# Allegro board ASR6601QFN68_Module_V10_210527.brd
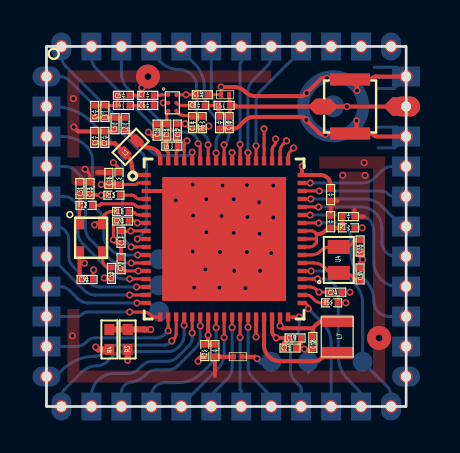
[diagram p0: board, top side]
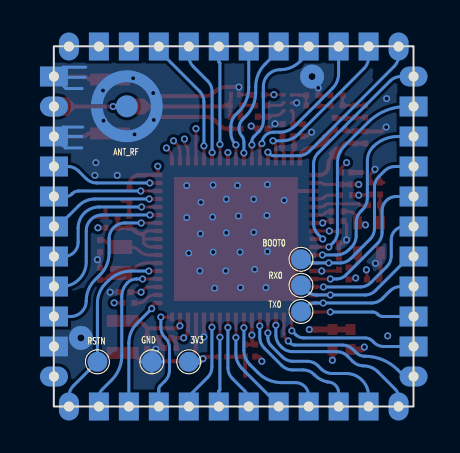
[diagram p1: board, bottom side, seen from below]

Outline 18.01 x 18.01 mm; copper layers: TOP, GND, VCC, BOTTOM. Coordinates in mm from the lower left corner of the outline.
Outline path: rectangle 0,0 18.01,18.01

## Placement (name value [footprint] x y rotation side)
C1  47nF  [C0201]  2.42 13.46 270 top
C2  82pF  [C0201]  2.92 13.46 270 top
C3  5.0pF  [C0201]  3.43 14.14 90 top
C4  3.3pF  [C0201]  2.42 14.75 90 top
C5  12pF  [C0201]  3.85 15.56 0 top
C6  100pF  [C0201]  5.07 15.05 0 top
C7  8.2pF  [C0201]  5.07 15.56 0 top
C8  100pF  [C0201]  7.62 15.06 0 top
C9  NC  [C0201]  8.66 14.19 90 top
C10  NC  [C0201]  9.14 14.19 90 top
C11  4.7pF  [C0201]  6.02 13.82 90 top
C12  3.9pF  [C0201]  6.55 13.82 90 top
C13  1pF  [C0201]  5.54 13.82 90 top
C14  100pF  [C0201]  7.32 14.19 270 top
C15  100pF  [C0201]  7.8 15.59 180 top
C16  0.1uF  [C0201]  3.12 11.4 90 top
C17  0.1uF  [C0201]  3.73 8.46 270 top
C18  0.47uF  [C0201]  13.34 3.2 270 top
C19  0.1uF  [C0201]  12.45 3.43 180 top
C20  0.1uF  [C0201]  3.81 9.27 0 top
C21  2.2uF  [C0201]  12.19 2.92 180 top
C22  0.1uF  [C0201]  3.73 7.14 270 top
C23  0.1uF  [C0201]  8.43 2.79 90 top
C24  0.1uF  [C0201]  14.48 5.71 0 top
C27  2.2uF  [C0201]  14.23 9.24 90 top
C28  0.01uF  [C0201]  15.12 9.49 180 top
C30  0R(0.1uF)  [C0201]  2.03 6.35 180 top
C31  NC(10pF)  [C0201]  1.68 10.9 90 top
C32  0R  [C0201]  3.25 6.65 270 top
C33  NC(10pF)  [C0201]  2.18 10.9 90 top
C34  NC(10pF)  [C0201]  15.7 6.63 90 top
C35  NC(10pF)  [C0201]  15.7 8.03 90 top
C36  0.1uF  [C0201]  14.22 10.59 270 top
D1  PESD3V3Z1BSF  [DSN0603_2N_MM]  9.58 2.49 180 top
D2  PESD5V0H1BSF  [DSN0603_2N_MM]  8.94 15.59 0 top
J1  -  [IPEX]  15.2 15 180 top
J2  HDR  [ASR6601QFN48_1600X1600_46N3_MM]  9 9 0 top
L1  56nH  [L0402]  4.22 12.98 225 top
L2  2.2nH  [L0201]  3.94 14.14 90 top
L3  8.2nH  [L0201]  2.92 14.75 90 top
L4  18nH  [L0201]  3.85 15.05 0 top
L5  0R  [L0201]  8.89 15.06 0 top
L6  33nH  [L0201]  6.28 13.02 180 top
L7  15uH  [L2016]  14.55 3.48 90 top
R1  0R  [R0201]  15.12 8.93 180 top
R2  0R  [R0201]  7.92 2.79 90 top
R3  0R  [R0402]  4.06 3.35 90 top
R4  0R  [R0402]  3.15 3.35 90 top
R5  100R  [R0201]  14.27 5.18 0 top
R6  100R  [R0201]  7.8 14.19 270 top
R7  NC(0R)  [R0201]  3.63 11.4 90 top
R11  NC(0R)  [R0201]  3.81 9.75 0 top
R12  0R  [R0201]  1.98 10.06 0 top
R13  0R  [R0201]  3.38 10.57 0 top
TP1  TP  [TP_SMD180CR120_110C_MM]  14.35 15.01 0 bottom
TP2  TP_1MM  [TP_SMD100C100_MM]  11.25 2.24 180 bottom
TP3  TP_1MM  [TP_SMD100C100_MM]  13.1 2.24 180 bottom
TP4  TP_1MM  [TP_SMD100C100_MM]  5.64 7.36 180 bottom
TP5  TP_1MM  [TP_SMD100C100_MM]  15.82 2.24 180 bottom
TP6  TP_1MM  [TP_SMD100C100_MM]  5.64 6.06 180 bottom
TP7  TP_1MM  [TP_SMD100C100_MM]  5.64 4.75 180 bottom
U1  ASR6601QFN68  [ASR6505_QFN40P_800X800_68N_MM]  8.89 8.38 0 top
U2  XMSSJR6G0BA-093  [QFN40P_110X70_6N_MM]  6.3 15.18 0 top
U3  TCXO/XO_32M  [OSC_SMD200X160_4N_MM]  2.24 8.43 270 top
U4  XO_32.768K  [XTAL_SMD160X100_2N_MM]  14.63 7.33 90 top

## Library data of the parts
C1-C24 C27 C28 C30-C36 = RCL_CAP_NP
D1 D2 = TVS-BI
J1 = UFLR_0
J2 = CN_9
L1-L7 = RCL_IND
R1-R7 R11-R13 = RCL_RES
TP1 = UFLR_1
TP2-TP7 = TP_SMT
U1 = ASR6505_11
U2 = MXD8625C_0
U3 = TCXO_32M
U4 = XO

## Footprints (pads in the part's own frame, mm; a bottom-side part is the same pattern mirrored in y, then rotated)
ASR6505_QFN40P_800X800_68N_MM
  rect 0.45x0.22 smd: 1(-3.9,3.2) 2(-3.9,2.8) 3(-3.9,2.4) 4(-3.9,2) 5(-3.9,1.6) 6(-3.9,1.2) 7(-3.9,0.8) 8(-3.9,0.4) 9(-3.9,0) 10(-3.9,-0.4) 11(-3.9,-0.8) 12(-3.9,-1.2) 13(-3.9,-1.6) 14(-3.9,-2) 15(-3.9,-2.4) 16(-3.9,-2.8) 17(-3.9,-3.2) 35(3.9,-3.2) 36(3.9,-2.8) 37(3.9,-2.4) 38(3.9,-2) 39(3.9,-1.6) 40(3.9,-1.2) 41(3.9,-0.8) 42(3.9,-0.4) 43(3.9,0) 44(3.9,0.4) 45(3.9,0.8) 46(3.9,1.2) 47(3.9,1.6) 48(3.9,2) 49(3.9,2.4) 50(3.9,2.8) 51(3.9,3.2)
  rect 0.22x0.45 smd: 18(-3.2,-3.9) 19(-2.8,-3.9) 20(-2.4,-3.9) 21(-2,-3.9) 22(-1.6,-3.9) 23(-1.2,-3.9) 24(-0.8,-3.9) 25(-0.4,-3.9) 26(0,-3.9) 27(0.4,-3.9) 28(0.8,-3.9) 29(1.2,-3.9) 30(1.6,-3.9) 31(2,-3.9) 32(2.4,-3.9) 33(2.8,-3.9) 34(3.2,-3.9) 52(3.2,3.9) 53(2.8,3.9) 54(2.4,3.9) 55(2,3.9) 56(1.6,3.9) 57(1.2,3.9) 58(0.8,3.9) 59(0.4,3.9) 60(0,3.9) 61(-0.4,3.9) 62(-0.8,3.9) 63(-1.2,3.9) 64(-1.6,3.9) 65(-2,3.9) 66(-2.4,3.9) 67(-2.8,3.9) 68(-3.2,3.9)
  rect 6.2x6.2 smd: 69(0,0)
ASR6601QFN48_1600X1600_46N3_MM
  round 0.65 hole 0.5: 1(-8.25,9) 2(-6.75,9) 3(-5.25,9) 4(-3.75,9) 5(-2.25,9) 6(-0.75,9) 7(0.75,9) 8(2.25,9) 9(3.75,9) 10(5.25,9) 11(6.75,9) 12(8.25,9) 13(9,7.5) 15(9,4.5) 16(9,3) 17(9,1.5) 18(9,0) 19(9,-1.5) 20(9,-3) 21(9,-4.5) 22(9,-6) 23(9,-7.5) 24(8.25,-9) 25(6.75,-9) 26(5.25,-9) 27(3.75,-9) 28(2.25,-9) 29(0.75,-9) 30(-0.75,-9) 31(-2.25,-9) 32(-3.75,-9) 33(-5.25,-9) 34(-6.75,-9) 35(-8.25,-9) 36(-9,-7.5) 37(-9,-6) 38(-9,-4.5) 39(-9,-3) 40(-9,-1.5) 41(-9,0) 42(-9,1.5) 43(-9,3) 44(-9,4.5) 45(-9,6) 46(-9,7.5)
  oval 1.4x1 hole 0.5: 14(9,6)
C0201
  rect 0.3x0.3 smd: 1(-0.3,0) 2(0.3,0)
DSN0603_2N_MM
  rect 0.2x0.28 smd: 1(-0.2,0) 2(0.2,0)
IPEX
  rect 2x0.6 smd: 1(0,1.35) 2(0,-1.35)
  rect 0.7x0.8 smd: 3(1.35,0)
L0201
  rect 0.3x0.3 smd: 1(-0.3,0) 2(0.3,0)
L0402
  rect 0.47x0.58 smd: 1(-0.425,0) 2(0.425,0)
L2016
  rect 0.6x1.6 smd: 1(-0.8,0) 2(0.8,0)
OSC_SMD200X160_4N_MM
  rect 0.65x0.45 smd: 1(-0.75,-0.575) 2(0.75,-0.575) 3(0.75,0.575) 4(-0.75,0.575)
QFN40P_110X70_6N_MM
  round 0.2 smd: 1(-0.2,0.4) 2(-0.2,0) 3(-0.2,-0.4) 4(0.2,-0.4) 5(0.2,0) 6(0.2,0.4)
R0201
  rect 0.3x0.3 smd: 1(-0.3,0) 2(0.3,0)
R0402
  rect 0.55x0.5 smd: 1(-0.5,0) 2(0.5,0)
TP_SMD100C100_MM
  round 1 smd: 1(0,0)
TP_SMD180CR120_110C_MM
  round 1.1 smd: 1(0,0)
  custom 3.597x3.6 smd: 2(0,0)
XTAL_SMD160X100_2N_MM
  rect 0.7x1.1 smd: 1(-0.65,0) 2(0.65,0)

## Nets
GND: C1.1 C2.1 C3.1 C5.2 C7.1 C9.1 C10.1 C12.2 C13.1 C14.2 C15.1 C16.2 C17.2 C18.2 C19.1 C20.1 C21.1 C22.1 C23.1 C24.2 C27.2 C28.1 C30.2 C31.2 C33.2 C34.2 C35.1 C36.2 D1.2 D2.1 J1.1 J1.2 J2.13 J2.15 J2.22 TP1.2 TP3.1(TP) U1.3(GND_PLL) U1.30(GND_DCC) U1.69(GND) U2.2(GND) U3.2(GND#2)
VCC_3V3: D1.1 J2.23 R1.1 R2.1 R3.1 TP2.1(TP)
VDD_IN: C16.1 R4.1 R7.1 U1.2(VDD_IN)
VDD_RF: C19.2 C20.2 C21.2 R3.2 R4.2 U1.7(VBAT_RF) U1.32(VBAT_DCC)
VDDA: C27.1 C28.2 R1.2 U1.42(VBAT_RTC) U1.43(VBAT_ANA) U1.44(VREFP)
VDDD: C22.2 C23.2 C24.1 C36.1 R2.2 U1.13(VBAT_ESD0) U1.24(VBAT_ESD1) U1.37(VBAT_ESD_RTC) U1.51(VBAT_ESD2) U1.59(VABT_ESD3)
ANT_SW_CTRL: R5.1 U1.36(GPIO59/LORAC_RF_SW)
GPIO00: J2.45 U1.10(GPIO00/SPI_CLK)
GPIO01: J2.46 U1.9(GPIO01/SPI_SEL)
GPIO02: J2.43 TP4.1(TP) U1.12(GPIO02/SPI_MISO)
GPIO03: J2.44 U1.11(GPIO03/SPI_MOSI)
GPIO04: J2.16 U1.50(GPIO04/ADC_IN3)
GPIO05: J2.17 U1.49(GPIO05/ADC_IN2)
GPIO06: J2.42 U1.14(GPIO06/SWD_DAT)
GPIO07: J2.41 U1.15(GPIO07/SWD_CLK)
GPIO08: J2.18 U1.48(GPIO08/ADC_IN1)
GPIO09: J2.12 U1.52(GPIO09/DAC_OUT)
GPIO10: R6.2 U1.55(GPIO10/OPA0_OUT)
GPIO11: J2.19 U1.47(GPIO11/ADC_IN0)
GPIO12: J2.20 U1.46(GPIO12/XO24M_OUT)
GPIO13: J2.21 U1.45(GPIO13/XO24M_IN)
GPIO14: J2.38 U1.18(GPIO14/I2C_CLK)
GPIO15: J2.37 U1.19(GPIO15/I2C_DAT)
GPIO16: J2.40 TP6.1(TP) U1.16(GPIO16/UART0_RX)
GPIO17: J2.39 TP7.1(TP) U1.17(GPIO17/UART0_TX)
GPIO23: J2.36 U1.20(GPIO23)
GPIO24: J2.34 U1.22(GPIO24)
GPIO25: J2.35 U1.21(GPIO25)
GPIO26: J2.32 U1.25(GPIO26)
GPIO27: J2.33 U1.23(GPIO27)
GPIO28: J2.30 U1.27(GPIO28)
GPIO29: J2.31 U1.26(GPIO29)
GPIO30: J2.29 U1.28(GPIO30)
GPIO31: J2.28 U1.29(GPIO31)
GPIO32: J2.4 U1.62(GPIO32/COMP1_OUT)
GPIO33: J2.5 U1.61(GPIO33/COMP1_INN)
GPIO34: J2.2 U1.65(GPIO34/OPA2_OUT)
GPIO35: J2.1 U1.64(GPIO35/OPA2_INN)
GPIO36: J2.3 U1.63(GPIO36/OPA2_INP)
GPIO37: J2.6 U1.60(GPIO37/COMP1_INP)
GPIO40: J2.7 U1.58(GPIO40/OPA1_OUT)
GPIO41: J2.8 U1.57(GPIO41/OPA1_INN)
GPIO42: J2.9 U1.56(GPIO42/OPA1_INP)
GPIO44: J2.10 U1.54(GPIO44/OPA0_INN)
GPIO45: J2.11 U1.53(GPIO45/OPA0_INP)
GPIO58: J2.25 U1.38(GPIO58/LP_TIMER)
GPIO60: J2.26 U1.35(GPIO60/LPUART_RX)
GPIO62: J2.27 U1.34(GPIO62/WKUP)
PWR_TCXO: R11.2 U1.6(PWR_TCXO)
RF_ANT: C10.2 D2.2 J1.3 J2.14 L5.2 TP1.1
RFI_N: C11.1 L6.2 U1.67(RFI_N)
RFI_P: C12.1 L6.1 U1.66(RFI_P)
RFO: L1.1 L2.1 U1.68(RFO)
RSTN: J2.24 TP5.1(TP) U1.39(RSTN)
VR_PA: C1.2 C2.2 L1.2 U1.1(VR_PA)
VREG: C17.1 C18.1 L7.2 R7.2 U1.8(VDCC_RF) U1.33(VREG)
XO32K_IN: C34.1 U1.40(XO32K_IN) U4.1(XTA)
XO32K_OUT: C35.2 U1.41(XO32K_OUT) U4.2(XTB)
XTA: R13.2 U1.4(XTA)
XTB: R12.2 U1.5(XTB)
N16688294: C30.1 R11.1 U3.4(VCC)
N16688298: C31.1 R12.1 U3.1(GND#1)
N16688382: C32.2 C33.1 R13.1
N16688514: C32.1 U3.3(VOUT)
N16827128: L7.1 U1.31(DCC_SW)
N16895695: C8.2 C9.2 L5.1
N16895705: C11.2 C13.2 U2.3(RF1)
N16895733: C6.2 C7.2 U2.1(RF2)
N16895757: C15.2 R5.2 U2.6(V1)
N16895762: C3.2 C4.1 L2.2 L3.1
N16895764: C4.2 C5.1 L3.2 L4.1
N16895803: C14.1 R6.1 U2.4(VDD)
N16895926: C8.1 U2.5(ANT)
N16895955: C6.1 L4.2

## Via types
v1: diameter 0.356, hole 0.203, TOP to BOTTOM, 116 vias
v2: diameter 1.2, hole 0.35, TOP to BOTTOM, 2 vias

## Routing (per net, layer and track width the routed paths; a pad name or vN(x,y) marks a point on that pad's centre or on a via; arc(x,y) is an arc through that point)
GND: length 71.5
  TOP w0.15: C12.2 6.92,14.12 v1(6.93,14.14) 7.18,13.89 C14.2 ; v1(1.93,11.86) 2.07,11.72 arc(2.15,11.6) 2.18,11.44 C33.2 C31.2 ; v1(4.77,15.93) C7.1 C5.2 ; C17.2 3.57,8.16 arc(3.49,8.17) 3.42,8.22 3.35,8.28 v1(3.35,8.33) 3.35,9.11 C20.1 ; C35.1 15.7,7.47 v1(15.82,7.34) 15.7,7.21 C34.2 ; C31.2 1.68,11.4 ; C31.2 1.48,11.2 ; v1(8.74,15.97) D2.1 C15.1 ; C13.1 5.3,13.52 v1(5.11,13.72) ; U2.2 v1(5.85,15.18) ; C24.2 v1(15.19,5.71)
  TOP w0.2: U1.3 5.71,10.78 arc(5.99,10.72) 6.23,10.56 v1(6.48,10.31) ; C3.1 3.35,13.76 C2.1 ; C19.1 12.75,3.17 C21.1 12.85,2.92 v1(12.9,2.87) 12.9,2.87 arc(13.1,2.79) 13.3,2.87 C18.2 ; J1.1 14.01,13.65 v1(13.96,13.61) 13.82,13.61 arc(13.73,13.63) 13.65,13.68 v1(13,14.33) 12.91,14.42 arc(12.85,14.46) 12.77,14.48 10.35,14.48 arc(10.13,14.43) 9.94,14.31 9.64,14.01 arc(9.51,13.92) 9.35,13.89 C10.1 C9.1 ; J1.1 16.21,13.65 arc(16.29,13.63) 16.36,13.59 16.39,13.56 arc(16.46,13.52) 16.54,13.5 J2.15 ; J1.1 15.52,13.97 v1(15.52,14.29) ; v1(8.74,15.97) 9.41,15.97 arc(9.69,15.92) 9.92,15.76 9.94,15.73 arc(10.18,15.58) 10.46,15.52 12.79,15.52 arc(12.87,15.54) 12.94,15.58 v1(13.03,15.67) ; J1.2 15.54,16.01 v1(15.54,15.8) ; J1.2 16.17,16.35 arc(16.25,16.37) 16.31,16.41 16.34,16.44 arc(16.41,16.48) 16.49,16.5 J2.13 ; J1.2 15.14,16.41 v1(14.04,16.41) 13.87,16.41 13.87,16.41 13.77,16.41 v1(13.03,15.67) ; v1(13.03,15.67) 13.03,15.67 ; U3.2 1.66,7.16 ; 1.66,7.16 1.66,6.42 C30.2 ; 1.66,7.16 v1(1.91,7.16) ; U1.30 v1(10.49,3.48) ; C27.2 14.23,10.04 14.22,10.04 C36.2 14.57,10.29 ; 15.42,9.85 C28.1 15.89,9.49 ; v1(1.37,13.97) 1.59,13.76 C1.1 ; 8.43,1.52 C23.1 8.68,2.49 8.69,2.49 D1.2 ; C17.2 C22.1
  TOP w0.25: C1.1 C2.1 ; C16.2 2.57,11.7
  GND w0.15: 16.72,7.03 16.73,7.03
  GND w0.2: 17.82,16.5 17.27,17.04 ; 17.82,16.5 J2.13 ; 17.82,16.5 16.82,16.5 ; 17.8,16.5 17.07,15.77 ; J2.22 17.34,2.34 ; J2.22 17.44,3.56 ; J2.22 17.15,3 ; 17.2,14.1 17.8,13.5 ; 17.8,13.5 17.14,12.85 ; 17.8,13.5 16.95,13.5 ; 17.8,13.5 J2.15
  VCC w0.15: 17.05,16.5 J2.13 ; J2.13 17.46,17.04 17.14,17.04 ; J2.13 17.35,15.85 17.17,15.85 ; 17.99,13.51 17.35,14.15 17.09,14.15 ; 17.02,12.9 17.4,12.9 J2.15
  VCC w0.2: J2.22 17.49,3.51 ; J2.22 17.4,2.4 ; J2.22 17.19,3 ; 17.04,13.51 17.99,13.51 J2.15
  BOTTOM w0.15: 16.61,12.93 17.43,12.93 J2.15 ; J2.15 17.53,13.97 16.56,13.97 ; J2.15 16.6,13.5 ; TP3.1 13.65,2.24 ; TP3.1 13.1,2.79 ; TP3.1 13.1,1.68 ; TP3.1 12.55,2.24 ; 16.43,16.46 17.96,16.46 ; 17.96,16.46 17.4,15.9 16.59,15.9 ; 17.96,16.46 J2.13 17.53,16.97 16.41,16.97
  vias: v1(1.35,15.39) v1(1.3,3.53) v1(7.32,11.1) v1(7.34,9.55) v1(7.32,7.75) v1(7.39,5.94) v1(8,10.36) v1(8,8.71) v1(7.95,6.86) v1(8.69,7.72) v1(8.66,5.94) v1(8.81,11.05) v1(8.76,9.53) v1(9.37,10.36) v1(9.37,8.69) v1(9.4,6.78) v1(10.03,11.07) v1(10.03,7.72) v1(9.96,5.92) v1(10.06,9.47) v1(10.64,10.21) v1(10.67,8.64) v1(10.69,6.78) v1(11.25,7.67) v1(11.35,11.05) v1(11.35,9.45) v1(14.83,11.56) v1(15.9,12.19) v1(15.95,11.56) v2(5.08,16.5) v2(16.65,3.43)
VCC_3V3: length 26.6
  TOP w0.2: D1.1 10.44,2.49 v1(10.54,2.39) ; v1(15.8,8.93) R1.1 ; R2.1 7.79,2.49 arc(7.65,2.44) 7.59,2.29 v1(7.59,2.26)
  TOP w0.3: R3.1 v1(4.06,2.31)
  VCC w0.2: v1(15.8,8.93) 16.14,8.59 arc(16.36,8.27) 16.43,7.88 16.43,6.96 arc(16.34,6.47) 16.06,6.05 arc(15.94,5.87) 15.89,5.66 15.89,1.52
  VCC w0.3: 7.59,1.52 v1(7.59,2.26) ; 7.59,1.52 5.38,1.52 arc(4.89,1.62) 4.48,1.9 v1(4.06,2.31) ; 7.59,1.52 10.59,1.52 ; J2.23 17.98,1.52 10.59,1.52 ; v1(10.54,2.39) 10.54,2.06 10.53,2.05 10.53,1.58 10.59,1.52
  BOTTOM w0.3: v1(10.54,2.39) 10.59,2.39 10.74,2.24 TP2.1
VDD_IN: length 12.3
  TOP w0.15: U1.2 4.57,11.18 4.5,11.1 R7.1
  TOP w0.2: R7.1 C16.1 2.75,11.1 v1(2.74,11.1)
  TOP w0.3: R4.1 2.58,2.85 v1(2.46,2.97)
  VCC w0.25: v1(2.74,11.1) 2.43,11.1 arc(1.74,10.81) 1.45,10.12 1.45,5.42 arc(1.71,4.1) v1(2.46,2.97)
VDD_RF: length 18
  TOP w0.15: C20.2 4.45,9.27 v1(4.55,9.18) U1.7
  TOP w0.2: U1.32 11.29,3.77 arc(11.32,3.65) 11.39,3.55 v1(11.51,3.43) C19.2 11.89,3.17 C21.2
  TOP w0.3: v1(5.22,3.85) 4.89,3.85 4.89,3.85 R3.2 R4.2
  VCC w0.25: v1(4.55,9.18) 5.15,9.18 arc(5.58,9) 5.76,8.56 5.76,5.71 arc(5.82,5.41) 5.99,5.15 6.26,4.89 ; 6.26,4.89 v1(5.22,3.85) ; 6.26,4.89 6.44,4.7 arc(6.61,4.59) 6.81,4.55 9.87,4.55 arc(10.35,4.45) 10.75,4.18 v1(11.51,3.43)
VDDA: length 4.7
  TOP w0.15: 13.51,8.38 13.51,8.18 13.41,8.08 arc(13.3,8) 13.17,7.98 U1.42 ; 13.51,8.38 13.51,8.64 13.43,8.72 arc(13.37,8.76) 13.29,8.78 U1.44 ; 13.51,8.38 13.51,8.38 U1.43
  TOP w0.2: 13.51,8.64 13.54,8.61 arc(13.77,8.66) 13.97,8.79 14.12,8.94 C27.1 14.59,8.94 14.59,8.93 R1.2 C28.2
VDDD: length 35.3
  TOP w0.15: v1(9.29,12.7) U1.59 ; C24.1 v1(13.64,5.71) 13.5,5.86 arc(13.37,5.94) 13.21,5.98 U1.37 ; C22.2 3.8,6.78 v1(4.6,6.78) U1.13
  TOP w0.2: C36.1 14.22,11.07 arc(14.08,11.43) 13.72,11.58 U1.51 12.79,12.01 v1(12.8,12.01) ; U1.24 v1(8.09,3.57) 8.09,3.36 arc(8.07,3.27) 8.02,3.19 R2.2 C23.2
  VCC w0.2: v1(13.64,5.71) 12.19,5.71 ; 12.19,5.71 12.19,3.79 arc(11.9,3.09) 11.19,2.79 8.09,2.79 ; 12.19,5.71 12.19,11.66 12.24,11.71 ; v1(9.29,12.7) 9.29,12.27 arc(9.46,11.87) 9.86,11.71 12.24,11.71 ; v1(12.8,12.01) 12.57,11.79 arc(12.49,11.73) 12.39,11.71 12.24,11.71 ; 8.09,2.79 5.14,2.79 arc(4.62,2.9) 4.17,3.19 3.96,3.41 arc(3.66,3.85) 3.56,4.38 3.56,6.29 arc(3.7,6.63) 4.04,6.78 v1(4.6,6.78) ; 8.09,2.79 v1(8.09,3.57)
ANT_SW_CTRL: length 1.3
  TOP w0.15: R5.1 13.75,5.18 arc(13.58,5.22) 13.43,5.32 13.29,5.45 arc(13.16,5.54) 13,5.58 U1.36
GPIO00: length 10.2
  TOP w0.15: v1(4.24,7.97) 4.49,7.97 4.49,7.98 U1.10
  BOTTOM w0.15: J2.45 0.36,15 arc(1.4,14.79) 2.28,14.21 3.46,13.03 arc(3.72,12.64) 3.81,12.17 3.81,8.7 arc(3.86,8.43) 4.01,8.2 v1(4.24,7.97)
GPIO01: length 11.3
  TOP w0.15: U1.9 v1(4.55,8.38)
  BOTTOM w0.15: v1(4.55,8.38) 4.79,8.61 arc(4.95,8.85) 5,9.14 5,12.14 arc(4.95,12.42) 4.78,12.67 1.17,16.28 arc(0.93,16.44) 0.64,16.5 J2.46
GPIO02: length 9.9
  TOP w0.15: U1.12 v1(4.24,7.18)
  BOTTOM w0.15: J2.43 0.92,12 arc(1.21,11.94) 1.45,11.78 1.74,11.5 arc(1.9,11.25) 1.96,10.97 1.96,8.9 arc(2.01,8.61) 2.18,8.37 3.15,7.4 arc(3.39,7.23) 3.68,7.18 v1(4.24,7.18) 5.33,7.18 arc(5.44,7.2) 5.53,7.26 TP4.1
GPIO03: length 9.5
  TOP w0.15: U1.11 v1(4.56,7.58)
  BOTTOM w0.15: v1(4.56,7.58) 3.89,7.58 arc(3.53,7.65) 3.23,7.85 3.12,7.96 arc(2.93,8.23) 2.87,8.56 2.87,9.18 arc(2.81,9.5) 2.63,9.77 2.57,9.83 arc(2.38,10.11) 2.31,10.44 2.31,12.29 arc(2.24,12.67) 2.02,12.99 arc(1.46,13.37) 0.79,13.5 J2.44
GPIO04: length 5.5
  TOP w0.15: U1.50 v1(13.2,11.18)
  BOTTOM w0.15: v1(13.2,11.18) 15.86,11.18 arc(16.14,11.23) 16.39,11.4 16.77,11.78 arc(17.02,11.94) 17.3,12 J2.16
GPIO05: length 5.3
  TOP w0.15: U1.49 v1(13.65,10.78)
  BOTTOM w0.15: J2.17 17.4,10.5 arc(17.24,10.53) 17.1,10.63 17.08,10.65 arc(16.94,10.74) 16.77,10.78 v1(13.65,10.78)
GPIO06: length 7.6
  TOP w0.15: U1.14 v1(4.17,6.38)
  BOTTOM w0.15: J2.42 0.87,10.5 arc(1.37,10.29) 1.57,9.79 1.57,8.69 arc(1.63,8.41) 1.79,8.16 3.39,6.57 arc(3.6,6.43) 3.86,6.38 v1(4.17,6.38)
GPIO07: length 6.9
  TOP w0.15: U1.15 v1(4.51,5.98)
  BOTTOM w0.15: v1(4.51,5.98) 2.67,5.98 arc(2.38,6.03) 2.14,6.2 1.34,6.99 arc(1.17,7.24) 1.12,7.52 1.12,8.34 arc(0.92,8.81) 0.45,9 J2.41
GPIO08: length 5.7
  TOP w0.15: U1.48 v1(13.23,10.38)
  BOTTOM w0.15: v1(13.23,10.38) 15.95,10.38 arc(16.39,10.29) 16.76,10.04 17.25,9.55 17.25,9.55 17.74,9.06 arc(17.81,9.02) 17.89,9 J2.18
GPIO09: length 9.5
  TOP w0.15: v1(12.37,12.93) 12.22,12.78 arc(12.13,12.63) 12.09,12.46 U1.52
  VCC w0.15: J2.12 17.25,17.89 arc(17.23,17.81) 17.19,17.74 16.78,17.33 arc(16.62,17.09) 16.56,16.8 16.56,14.31 arc(16.5,14.02) 16.34,13.78 15.97,13.4 arc(15.73,13.24) 15.44,13.18 12.8,13.18 arc(12.64,13.15) 12.51,13.07 v1(12.37,12.93)
GPIO10: length 4.8
  TOP w0.15: U1.55 v1(10.89,13.89) ; R6.2 7.92,13.89 arc(7.99,13.91) 8.05,13.95 v1(8.13,14.02)
  VCC w0.15: v1(10.89,13.89) 10.89,13.9 10.77,14.02 v1(8.13,14.02)
GPIO11: length 6.9
  TOP w0.15: U1.47 v1(13.62,9.98)
  BOTTOM w0.15: J2.19 17.49,7.5 arc(17,7.71) 16.79,8.2 16.79,8.93 arc(16.48,9.67) 15.74,9.98 v1(13.62,9.98)
GPIO12: length 7.9
  TOP w0.15: U1.46 v1(13.2,9.58)
  BOTTOM w0.15: J2.20 17.61,6 arc(16.74,6.36) 16.38,7.23 16.38,8.79 arc(16.15,9.34) 15.6,9.58 v1(13.2,9.58)
GPIO13: length 8.4
  TOP w0.15: U1.45 v1(13.63,9.18)
  BOTTOM w0.15: v1(13.63,9.18) 14.46,9.18 arc(15.01,8.95) 15.24,8.39 15.24,7.66 arc(15.35,7.08) 15.68,6.59 15.95,6.32 arc(16.27,5.85) 16.38,5.28 arc(16.61,4.73) 17.17,4.5 J2.21
GPIO14: length 5.8
  TOP w0.15: U1.18 5.47,4.48 arc(5.32,4.5) 5.19,4.59 5.17,4.61 arc(5.05,4.69) 4.9,4.72 v1(4.17,4.72)
  BOTTOM w0.15: v1(4.17,4.72) 2.05,4.72 arc(1.92,4.7) 1.8,4.62 1.78,4.6 arc(1.67,4.53) 1.54,4.5 J2.38
GPIO15: length 7
  TOP w0.15: v1(6.09,3.78) U1.19
  BOTTOM w0.15: v1(6.09,3.78) 5.9,3.6 arc(5.72,3.47) 5.5,3.43 2.41,3.43 arc(2.23,3.39) 2.06,3.28 1.98,3.2 arc(1.76,3.05) 1.5,3 J2.37
GPIO16: length 7.4
  TOP w0.15: U1.16 v1(4.17,5.58)
  BOTTOM w0.15: J2.40 0.12,7.5 arc(0.19,7.48) 0.26,7.44 1.9,5.8 arc(2.15,5.63) 2.44,5.58 v1(4.17,5.58) 4.84,5.58 arc(5.13,5.63) 5.37,5.8 TP6.1
GPIO17: length 6.5
  TOP w0.15: U1.17 v1(4.52,5.18)
  BOTTOM w0.15: TP7.1 5.41,4.97 arc(5.19,5.12) 4.93,5.18 v1(4.52,5.18) 2.09,5.18 arc(1.81,5.23) 1.56,5.4 1.18,5.78 arc(0.94,5.94) 0.65,6 J2.39
GPIO23: length 8.1
  TOP w0.15: v1(6.27,3.28) 6.39,3.4 arc(6.47,3.51) 6.49,3.63 U1.20
  BOTTOM w0.15: J2.36 0.24,1.5 arc(0.44,1.54) 0.61,1.65 0.78,1.83 arc(1.55,2.34) 2.45,2.51 arc(2.67,2.56) 2.87,2.69 3.03,2.85 arc(3.27,3.02) 3.56,3.07 5.94,3.07 arc(6.06,3.1) 6.16,3.16 v1(6.27,3.28)
GPIO24: length 8
  TOP w0.15: U1.22 v1(7.29,3.68)
  BOTTOM w0.15: J2.34 2.25,0.52 arc(2.58,1.32) 3.38,1.65 4.08,1.65 arc(4.37,1.71) 4.61,1.87 4.78,2.04 arc(5.03,2.2) 5.31,2.26 6.04,2.26 arc(6.33,2.32) 6.57,2.48 7.14,3.05 arc(7.25,3.22) 7.29,3.42 v1(7.29,3.68)
GPIO25: length 8.9
  TOP w0.15: U1.21 v1(6.89,4.06)
  BOTTOM w0.15: J2.35 0.75,0.46 arc(0.79,0.68) 0.92,0.86 1.78,1.73 arc(2.12,1.95) 2.51,2.03 arc(2.8,2.09) 3.04,2.25 3.31,2.52 arc(3.55,2.69) 3.84,2.74 6.06,2.74 arc(6.35,2.8) 6.6,2.96 6.67,3.04 arc(6.84,3.28) 6.89,3.57 v1(6.89,4.06)
GPIO26: length 6.6
  TOP w0.15: U1.25 v1(8.49,3.94)
  BOTTOM w0.15: J2.32 5.25,0.53 arc(5.44,1) 5.91,1.19 6.23,1.19 6.62,1.2 arc(7.24,1.32) 7.77,1.68 8.2,2.1 arc(8.42,2.43) 8.49,2.81 v1(8.49,3.94)
GPIO27: length 6.9
  TOP w0.15: v1(7.7,4.03) 7.69,4.04 U1.23
  BOTTOM w0.15: J2.33 3.75,0.68 arc(3.91,1.07) 4.3,1.23 arc(4.65,1.35) 4.94,1.57 4.99,1.61 arc(5.23,1.77) 5.52,1.83 6.06,1.83 arc(6.35,1.89) 6.6,2.05 7.48,2.93 arc(7.64,3.17) 7.7,3.46 v1(7.7,4.03)
GPIO28: length 4.8
  TOP w0.15: U1.27 v1(9.29,3.95)
  BOTTOM w0.15: v1(9.29,3.95) 9.29,1.93 arc(9.24,1.65) 9.07,1.4 8.44,0.77 arc(8.3,0.56) 8.25,0.3 J2.30
GPIO29: length 5.3
  TOP w0.15: U1.26 v1(8.89,3.45)
  BOTTOM w0.15: v1(8.89,3.45) 8.89,2.65 arc(8.81,2.24) 8.58,1.89 6.79,0.11 arc(6.76,0.06) J2.31
GPIO30: length 4.5
  TOP w0.15: U1.28 v1(9.69,3.46)
  BOTTOM w0.15: v1(9.69,3.46) 9.69,0.83 9.75,0.78 J2.29
GPIO31: length 4.9
  TOP w0.15: U1.29 v1(10.09,3.96)
  BOTTOM w0.15: J2.28 11.25,0.27 arc(11.21,0.49) 11.08,0.68 10.31,1.45 arc(10.15,1.69) 10.09,1.98 v1(10.09,3.96)
GPIO32: length 7.2
  TOP w0.15: U1.62 v1(8.09,13.08)
  BOTTOM w0.15: v1(8.09,13.08) 8.09,13.25 arc(8.07,13.39) 7.99,13.5 7.74,13.75 arc(7.58,13.99) 7.52,14.28 7.52,16 arc(7.27,16.59) 6.67,16.84 arc(6.14,16.95) 5.69,17.25 5.39,17.55 arc(5.29,17.7) 5.25,17.89 J2.4
GPIO33: length 6.4
  TOP w0.15: U1.61 v1(8.49,12.68)
  BOTTOM w0.15: J2.5 6.75,17.89 arc(6.77,17.81) 6.81,17.74 7.44,17.11 arc(7.78,16.6) 7.9,16 7.9,15.71 arc(8.03,15.06) 8.4,14.52 8.55,14.36 arc(8.74,13.91) 8.55,13.47 arc(8.51,13.35) 8.49,13.22 v1(8.49,12.68)
GPIO34: length 8.2
  TOP w0.15: v1(7.04,13.28) 6.96,13.21 arc(6.92,13.14) 6.9,13.07 6.9,12.8 6.89,12.79 U1.65
  BOTTOM w0.15: J2.2 2.25,17.47 arc(2.31,17.16) 2.49,16.89 5.76,13.62 arc(6.13,13.37) 6.57,13.28 v1(7.04,13.28)
GPIO35: length 9.7
  TOP w0.15: U1.64 v1(7.29,12.72)
  BOTTOM w0.15: J2.1 0.75,17.54 arc(0.81,17.25) 0.97,17.01 4.5,13.47 4.5,13.47 4.86,13.11 4.86,13.11 5.22,12.76 arc(5.46,12.6) 5.75,12.54 7,12.54 arc(7.11,12.56) 7.19,12.62 v1(7.29,12.72)
GPIO36: length 7.8
  TOP w0.15: U1.63 7.69,13.04 v1(7.59,13.15)
  BOTTOM w0.15: J2.3 3.75,16.65 arc(3.83,16.25) 4.06,15.91 5.93,14.04 arc(6.28,13.8) 6.7,13.72 7.02,13.72 arc(7.42,13.55) v1(7.59,13.15)
GPIO37: length 6.1
  TOP w0.15: U1.60 v1(8.89,13.08)
  BOTTOM w0.15: J2.6 8.25,15.95 arc(8.38,15.3) 8.75,14.74 8.89,14.61 arc(9.08,14.32) 9.14,13.99 9.14,13.69 arc(9.08,13.36) v1(8.89,13.08)
GPIO40: length 5.7
  TOP w0.15: U1.58 v1(9.69,13.11)
  BOTTOM w0.15: J2.7 9.75,17.23 9.69,17.17 v1(9.69,13.11)
GPIO41: length 6.1
  TOP w0.15: v1(10.08,12.7) 10.09,12.69 U1.57
  BOTTOM w0.15: J2.8 11.25,17.53 arc(11.19,17.24) 11.03,17 10.3,16.27 arc(10.14,16.03) 10.08,15.74 v1(10.08,12.7)
GPIO42: length 6.6
  TOP w0.15: U1.56 v1(10.49,13.03)
  BOTTOM w0.15: v1(10.49,13.03) 10.49,15.22 arc(10.55,15.52) 10.72,15.77 12.69,17.74 arc(12.73,17.81) 12.75,17.89 J2.9
GPIO44: length 7.5
  TOP w0.15: U1.54 11.29,12.84 arc(11.31,12.94) 11.37,13.02 11.39,13.04 arc(11.45,13.13) 11.47,13.23 v1(11.47,13.37)
  VCC w0.15: v1(11.47,13.37) 11.57,13.47 arc(11.63,13.56) 11.65,13.66 11.65,15.5 arc(11.72,15.88) 11.94,16.21 12.03,16.3 arc(12.46,16.59) 12.97,16.69 arc(13.47,16.79) 13.89,17.07 14.25,17.43 arc(14.37,17.71) J2.10
GPIO45: length 8.1
  TOP w0.15: v1(12.01,13.28) 11.84,13.11 arc(11.73,12.95) 11.69,12.75 U1.53
  VCC w0.15: J2.11 15.75,17.17 arc(15.69,16.89) 15.53,16.64 15.06,16.17 arc(14.81,16.01) 14.53,15.95 arc(13.97,15.84) 13.49,15.52 13.3,15.33 arc(13.06,15.17) 12.77,15.11 arc(12.24,14.89) 12.01,14.36 v1(12.01,13.28)
GPIO58: length 8.2
  TOP w0.15: U1.38 13.31,6.38 13.31,6.37 v1(13.56,6.37)
  BOTTOM w0.15: J2.25 15.75,0.46 arc(15.71,0.67) 15.59,0.84 15.11,1.32 arc(14.74,1.88) 14.61,2.55 14.61,5.49 arc(14.53,5.87) 14.32,6.19 arc(14.11,6.33) 13.87,6.38 13.57,6.38 v1(13.56,6.37)
GPIO60: length 5.8
  TOP w0.15: v1(13.11,4.89) 13.11,5.03 12.96,5.18 U1.35
  BOTTOM w0.15: J2.26 14.25,3.17 arc(14.14,3.7) 13.84,4.16 v1(13.11,4.89)
GPIO62: length 5.3
  TOP w0.15: U1.34 12.31,4.48 12.32,4.47 v1(12.65,4.47)
  BOTTOM w0.15: v1(12.65,4.47) 12.65,3.95 arc(12.6,3.68) 12.44,3.45 12.42,3.43 arc(12.27,3.2) 12.22,2.94 12.22,1.81 arc(12.27,1.52) 12.44,1.28 12.69,1.02 arc(12.74,0.96) 12.75,0.89 12.75,0.78 J2.27
PWR_TCXO: length 0.9
  TOP w0.15: R11.2 4.24,9.75 arc(4.33,9.74) 4.4,9.68 4.43,9.65 arc(4.52,9.6) 4.62,9.58 U1.6
RF_ANT: length 10.8
  TOP w0.15: D2.2 9.14,15.33 9.19,15.28 L5.2 9.19,14.77 9.14,14.72 C10.2
  TOP w0.2: J2.14 v1(15.04,15) J1.3 9.5,15 9.44,15.06 L5.2
  BOTTOM w0.2: v1(15.04,15) 14.36,15 TP1.1 14.27,15.09
RFI_N: length 1.3
  TOP w0.1: 6,12.79 5.98,12.82
  TOP w0.15: 6,12.79 6.09,12.7 U1.67 ; 5.98,12.82 L6.2 5.98,13.24 6.02,13.29 C11.1
RFI_P: length 1.3
  TOP w0.15: C12.1 6.55,13.27 6.58,13.24 L6.1 6.58,12.79 6.49,12.71 U1.66
RFO: length 2.5
  TOP w0.2: U1.68 5.69,12.44 arc(5.66,12.61) 5.57,12.75 arc(5.34,12.9) 5.07,12.95 5.05,12.95 arc(4.86,12.99) 4.7,13.1 L1.1 3.96,13.84 L2.1
RSTN: length 9.6
  TOP w0.15: U1.39 13.22,6.78 13.22,6.77 v1(13.25,6.77)
  BOTTOM w0.15: v1(13.25,6.77) 14.12,6.77 arc(14.74,6.65) 15.27,6.3 15.42,6.15 arc(15.72,5.7) 15.82,5.17 TP5.1 17.03,1.03 arc(17.19,0.79) 17.25,0.5 J2.24
VR_PA: length 3.5
  TOP w0.2: C1.2 C2.2 3.44,13.16 L1.2 3.92,12.67 4.08,12.51 arc(4.22,12.3) 4.27,12.05 4.27,12 arc(4.39,11.7) 4.7,11.58 U1.1
VREG: length 21.4
  TOP w0.15: C17.1 4.2,8.76 v1(4.22,8.78) U1.8 ; v1(3.35,12.19) 3.63,11.91 R7.2
  TOP w0.2: C18.1 13.34,3.9 13.32,3.91 ; 13.32,3.91 11.82,3.91 11.7,4.03 v1(11.69,4.03) U1.33 ; 13.32,3.91 13.52,4.11 arc(13.71,4.24) 13.93,4.28 L7.2
  VCC w0.2: v1(3.35,12.19) 3.56,11.99 arc(3.69,11.79) 3.73,11.56 3.73,9.5 arc(3.78,9.28) 3.9,9.09 v1(4.22,8.78)
  VCC w0.25: v1(11.69,4.03) 10.96,4.76 arc(10.55,5.04) 10.08,5.13 7.63,5.13 arc(6.74,5.5) 6.38,6.38 6.38,8.53 arc(6.01,9.41) 5.13,9.78 3.73,9.78
XO32K_IN: length 3.2
  TOP w0.15: C34.1 15.57,6.33 arc(15.48,6.35) 15.4,6.4 15.29,6.52 arc(15.11,6.64) 14.89,6.68 14.4,6.68 arc(14.21,6.72) 14.05,6.82 13.92,6.96 arc(13.68,7.12) 13.39,7.18 U1.40
XO32K_OUT: length 3.1
  TOP w0.15: C35.2 15.57,8.33 arc(15.48,8.31) 15.4,8.26 15.29,8.14 arc(15.11,8.02) 14.89,7.98 U4.2 14.19,7.98 arc(13.94,7.93) 13.73,7.79 13.71,7.77 arc(13.5,7.63) 13.25,7.58 U1.41
XTA: length 1.4
  TOP w0.15: U1.4 4.68,10.38 arc(4.57,10.4) 4.47,10.46 4.45,10.48 arc(4.36,10.54) 4.25,10.57 R13.2
XTB: length 2.8
  TOP w0.15: R12.2 2.67,10.06 2.74,10.13 4.27,10.13 arc(4.36,10.12) 4.44,10.07 4.46,10.04 arc(4.54,9.99) 4.63,9.98 U1.5
N16688294: length 4.4
  TOP w0.15: C30.1 2.33,6.8 v1(2.36,6.83) ; R11.1 3.3,9.75 arc(3.1,9.71) 2.92,9.6 arc(2.84,9.47) 2.81,9.33 U3.4 2.51,9.18 v1(2.41,9.08)
  VCC w0.15: v1(2.41,9.08) 2.51,8.98 arc(2.55,8.92) 2.57,8.84 2.57,7.15 arc(2.54,7.04) 2.48,6.96 v1(2.36,6.83)
N16688298: length 1.4
  TOP w0.15: U3.1 1.66,9.81 1.68,9.83 R12.1 1.68,10.28 1.68,10.29 C31.1
N16688382: length 5.5
  TOP w0.15: R13.1 v1(2.74,10.57) 2.49,10.57 2.46,10.6 C33.1 ; C32.2 2.97,6.35 v1(2.9,6.43)
  VCC w0.15: v1(2.9,6.43) 2.9,9.99 arc(2.88,10.08) 2.83,10.15 2.81,10.17 arc(2.76,10.24) 2.74,10.33 v1(2.74,10.57)
N16688514: length 1
  TOP w0.15: U3.3 2.81,7.32 arc(2.92,7.06) 3.18,6.95 C32.1
N16827128: length 5.6
  TOP w0.2: L7.1 14.37,2.68 arc(14.08,2.62) 13.83,2.46 arc(13.62,2.32) 13.37,2.27 11.69,2.27 arc(11.13,2.5) 10.89,3.06 U1.31
N16895695: length 1.3
  TOP w0.15: C9.2 8.66,14.72 8.59,14.79 L5.1 C8.2
N16895705: length 1.2
  TOP w0.15: C11.2 6.02,14.7 U2.3
  TOP w0.2: C13.2 C11.2
N16895733: length 1.2
  TOP w0.15: U2.1 5.73,15.58 5.7,15.56 C7.2 C6.2
N16895757: length 18.1
  TOP w0.15: R5.2 v1(14.99,5.18) ; C15.2 v1(6.99,15.59) 6.99,15.58 U2.6
  VCC w0.15: v1(6.99,15.59) 7.23,15.35 arc(7.39,15.12) 7.44,14.83 7.44,14.34 arc(7.66,13.81) 8.19,13.59 10.25,13.59 arc(10.59,13.52) 10.88,13.33 11.45,12.76 arc(11.74,12.57) 12.08,12.5 13.77,12.5 arc(14.16,12.33) 14.33,11.94 14.33,5.59 arc(14.44,5.3) 14.73,5.18 v1(14.99,5.18)
N16895762: length 1.5
  TOP w0.15: C4.1 L3.1 3.42,14.45 C3.2 L2.2
N16895764: length 1.6
  TOP w0.15: C5.1 L4.1 3.15,15.05 L3.2 C4.2
N16895803: length 1.4
  TOP w0.15: R6.1 C14.1 7.14,14.49 7.08,14.55 6.88,14.55 arc(6.74,14.58) 6.63,14.66 U2.4
N16895926: length 0.9
  TOP w0.15: U2.5 6.58,15.11 arc(6.63,15.07) 6.7,15.06 C8.1
N16895955: length 0.6
  TOP w0.15: C6.1 L4.2

## Copper pours and planes (outline as drawn; the poured copper is in the pictures)
GND on TOP: 1.3,12.01 2.82,12.01 2.95,11.89 3.23,11.89 3.28,11.84 3.28,11.56 3.23,11.51 2.39,11.51 2.34,11.46 2.34,11.1 2.29,11.05 1.37,11.05 1.24,11.18 1.24,11.96
GND on TOP: 1.05,12.44 1.05,16.8 11.25,16.8 11.25,16.2 1.65,16.2 1.65,12.44
GND on TOP: 14.71,11.73 16.03,11.73 16.18,11.58 16.18,9.42 16.08,9.32 15.34,9.32 15.24,9.42 15.24,9.8 15.16,9.88 14.5,9.88 14.43,9.8 14.43,9.42 14.38,9.37 14.07,9.37 14.02,9.42 14.02,10.41 14.07,10.46 14.58,10.46 14.66,10.54 14.66,11.68
GND on TOP: 1.05,1.2 1.05,4.88 1.65,4.88 1.65,1.8 16.35,1.8 16.35,11.9 13.65,11.9 13.65,12.5 16.95,12.5 16.95,1.2
GND on BOTTOM: 0,0 0,12.34 0.84,12.34 0.84,13.34 0,13.34 0,13.79 0.84,13.79 0.84,14.68 0,14.68 0,15.39 0.81,15.39 0.81,16.59 0,16.59 0,18 4.04,18 4.04,17.2 4.83,17.2 4.83,18 8.66,18 8.66,17.17 9.35,17.17 9.35,18 13.18,18 13.18,17.2 18,17.2 18,5.84 17.17,5.84 17.17,4.95 18,4.95 18,0 14.22,0 14.22,0.84 12.98,0.84 12.98,0 ; 26 cut-outs
GND on GND: 0,0 0,18 18,18 18,0
GND on VCC: 0,0 0,18 18,18 18,0 ; 5 cut-outs

Small or netless copper shapes (teardrops, artwork), in the pictures only: 3 on TOP

## Text on the board
Ref Des/Silkscreen Bottom: RX0 | TX0 | BOOT0 | 3V3 | GND | ANT_RF | RSTN
NCLEGEND-1-4: FIGURE | SIZE | 0.2032 | 0.5 | 1.0x0.35 | DRILL CHART: TOP to BOTTOM | ALL UNITS ARE IN MILLIMETERS | TOLERANCE | +0.0762/-0.0762 | +0.0/-0.0 | PLATED | QTY | 116 | 46 | 1
